# EAGLE board LaunchPadSpiBus2_a (EAGLE 6.4)
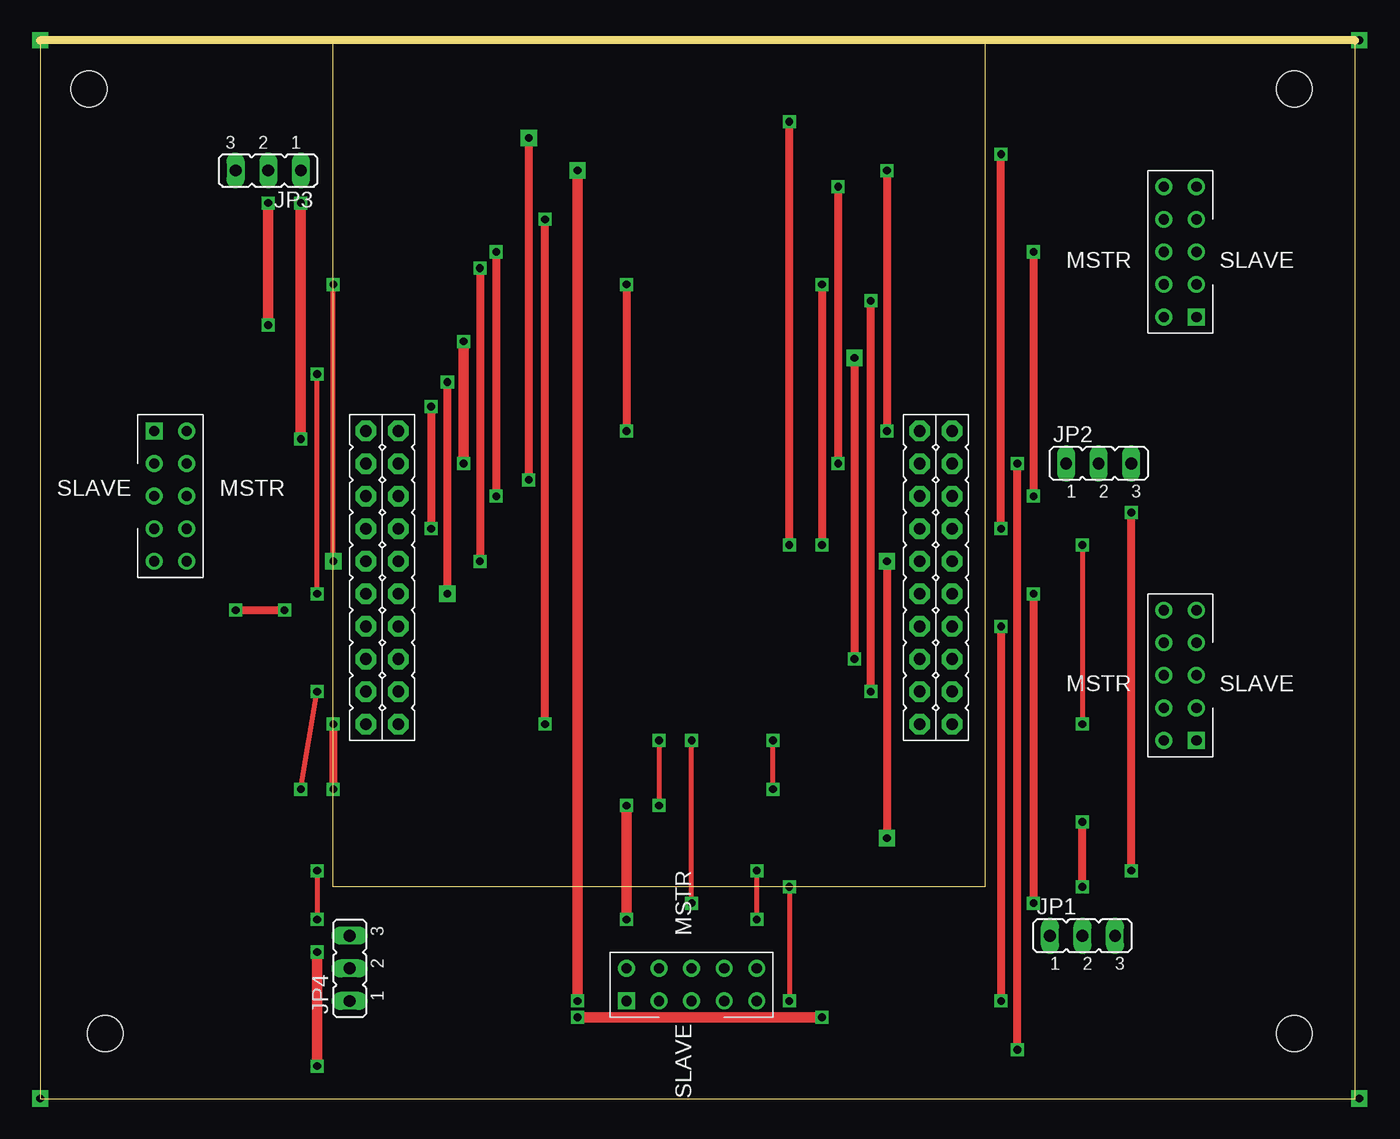
[diagram p0: board, top side]
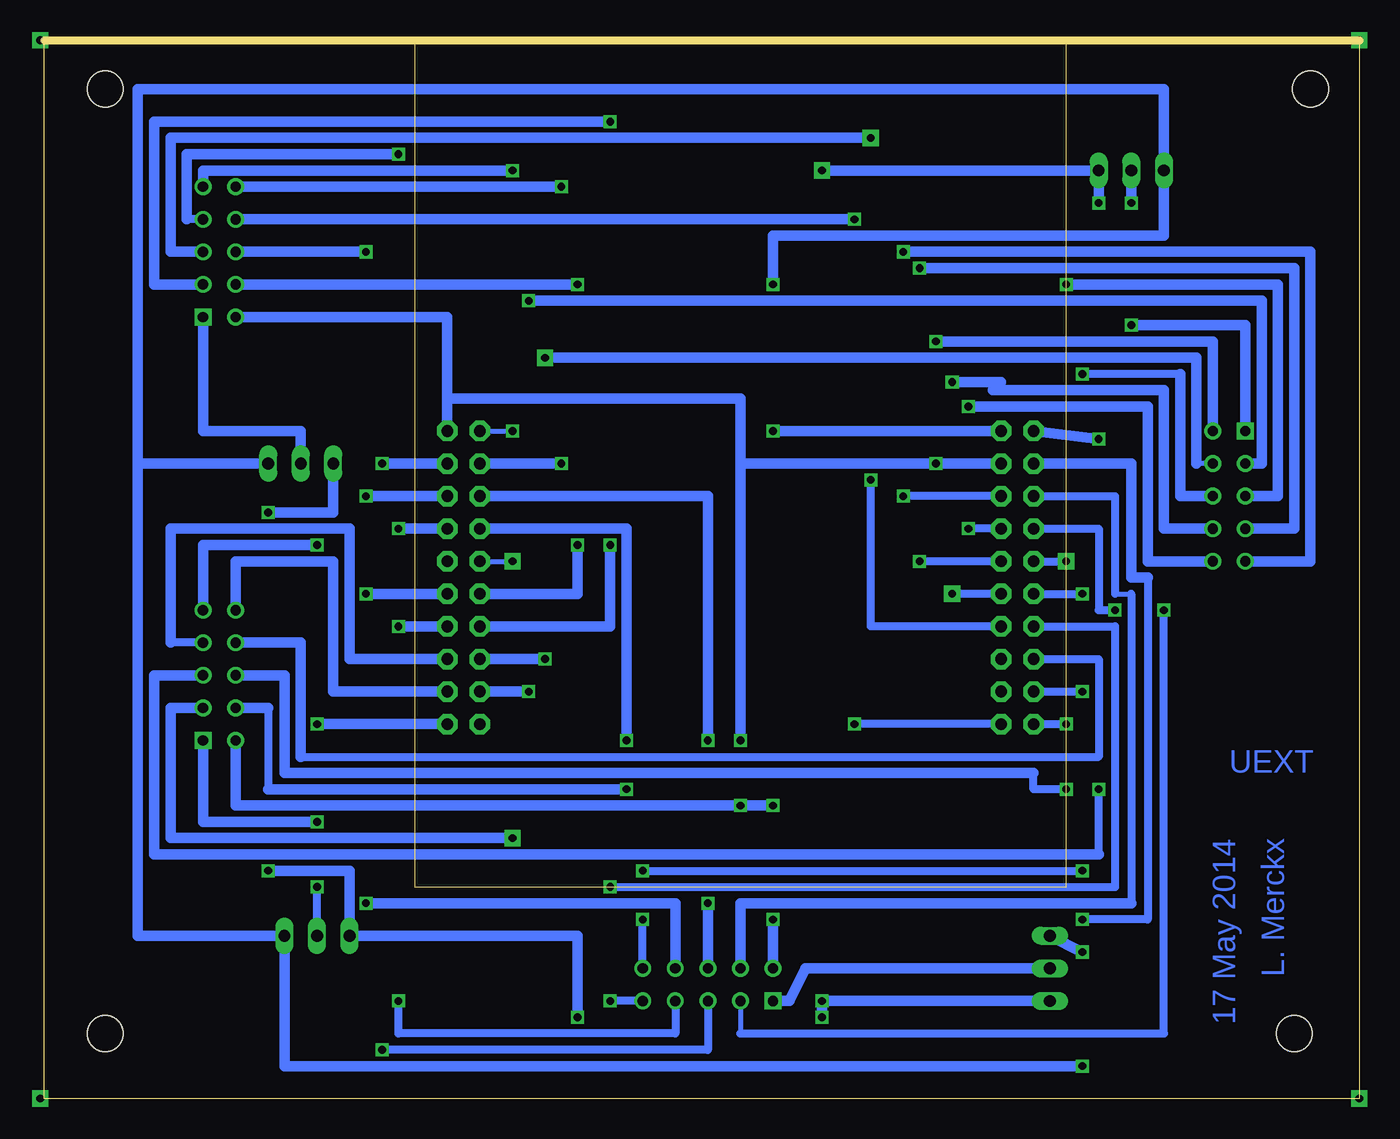
[diagram p1: board, bottom side, seen from below]

Size 102.54 x 82.55 mm. Coordinates in mm from the lower left corner, seen from the top.
Outline: 0,0 102.54,0 102.54,82.54 0,82.54 0,0
Copper layers (1*16): Top 0.035mm / dielectric 1.5mm / Bottom 0.035mm
Design rules "default": minimum track width 10mil, minimum drill 24mil, track to track 8mil, track to pad 8mil, pad to pad 8mil, via to via 8mil, smd to smd 8mil, copper to edge 40mil, drill to drill 8mil, minimum pad ring 10mil, minimum via ring 8mil, stop-mask expansion 4mil, vias tented up to drill 0mil, thermal gap 10mil
Holes 2.8 mm at 5.08,5.08 3.81,78.74 97.79,78.74 97.79,5.08

## Footprints (pad centres in the part's own frame; a part is rotated, then mirrored left to right if it is on the bottom)
JP2 = drill 0.914 long: 1 -2.54,0; 2 0,0; 3 2.54,0
LAUNCHPAD-XL = drill 0.914 pad 1.6 octagon: 3.3V 30.48,2.54; GND1 33.02,5.08; GND2 30.48,48.26; PA2 53.34,48.26; PA3 50.8,48.26; PA4 48.26,48.26; PA5 48.26,2.54; PA6 50.8,2.54; PA7 53.34,2.54; PB0 35.56,2.54; PB1 38.1,2.54; PB2 33.02,48.26; PB3 35.56,45.72; PB4 45.72,2.54; PB5 33.02,2.54; PB6 45.72,48.26; PB7 43.18,48.26; PC4 38.1,45.72; PC5 40.64,45.72; PC6 43.18,45.72; PC7 45.72,45.72; PD0 35.56,5.08; PD1 38.1,5.08; PD2 40.64,5.08; PD3 43.18,5.08; PD6 48.26,45.72; PD7 50.8,45.72; PE0 35.56,48.26; PE1 45.72,5.08; PE2 48.26,5.08; PE3 50.8,5.08; PE4 40.64,2.54; PE5 43.18,2.54; PF0 38.1,48.26; PF1 53.34,5.08; PF2 30.48,45.72; PF3 33.02,45.72; PF4 53.34,45.72; RST 40.64,48.26; VBUS 30.48,5.08
SPI_BUS2 = drill 0.8 square: +VCC 0,10.16 | drill 0.8: CS 2.54,0; GND 2.54,10.16; GPIO/RXD 2.54,7.62; INT/SDA 2.54,5.08; MISO 0,2.54; MOSI 2.54,2.54; RST/SCL 0,5.08; SCK 0,0; TXD 0,7.62

## Placement (x,y rotation side)
JP1  [JP2]  81.28,12.7 0 top
JP2  [JP2]  82.55,49.53 0 top
JP3  [JP2]  17.78,72.39 180 top
JP4  [JP2]  24.13,10.16 90 top
U$1  STELLARIS-LAUNCHPADSTELLARIS-LAUNCHPAD-XL  [LAUNCHPAD-XL]  22.86,82.55 270 top
U$2  SPI_BUS2  [SPI_BUS2]  90.17,38.1 180 top
U$3  SPI_BUS2  [SPI_BUS2]  90.17,71.12 180 top
U$4  SPI_BUS2  [SPI_BUS2]  8.89,41.91 0 top
U$5  SPI_BUS2  [SPI_BUS2]  55.88,7.62 90 top

## Library data of the parts
JP1-JP4 = jumper
U$1-U$5 = lieven

## Nets
+3V3: JP1.1 JP2.1 JP3.1 JP4.1 U$1.3.3V
+5V: JP1.3 JP2.3 JP3.3 JP4.3 U$1.VBUS
N$1: U$1.PA2 U$2.SCK
N$2: U$1.PA4 U$2.MISO
N$3: U$1.PA5 U$2.MOSI
N$4: U$1.PA3 U$2.CS
N$5: U$1.PC5 U$2.TXD
N$6: JP1.2 U$2.+VCC
N$7: U$1.GND1 U$1.GND2 U$2.GND U$3.GND U$4.GND U$5.GND
N$8: U$1.PF2 U$3.SCK
N$9: U$1.PF0 U$3.MISO
N$10: U$1.PF1 U$3.MOSI
N$11: U$1.PF3 U$3.CS
N$12: U$1.PD0 U$4.SCK
N$13: U$1.PD2 U$4.MISO
N$14: U$1.PD3 U$4.MOSI
N$15: U$1.PD1 U$4.CS
N$16: U$1.PB5 U$5.CS
N$17: U$1.PB6 U$5.MISO
N$18: U$1.PB7 U$5.MOSI
N$19: U$1.PB4 U$5.SCK
N$20: U$1.PA6 U$2.RST/SCL
N$21: U$1.PA7 U$2.INT/SDA
N$22: U$1.PC4 U$2.GPIO/RXD
N$23: U$1.PB3 U$5.INT/SDA
N$24: U$1.PB0 U$5.GPIO/RXD
N$25: U$1.PB2 U$5.RST/SCL
N$26: U$1.PB1 U$5.TXD
N$27: U$1.PD6 U$4.GPIO/RXD
N$28: U$1.PD7 U$4.TXD
N$29: U$1.PE4 U$4.RST/SCL
N$30: U$1.PE5 U$4.INT/SDA
N$31: U$1.PC6 U$3.GPIO/RXD
N$32: U$1.PC7 U$3.TXD
N$33: U$1.PE0 U$3.INT/SDA
N$34: U$1.PE1 U$3.RST/SCL
N$35: JP2.2 U$3.+VCC
N$36: JP3.2 U$4.+VCC
N$37: JP4.2 U$5.+VCC
RST: U$1.RST

## Tracks (layer width: path | path; a pad name or v marks a point on that pad's centre or on a via)
+3V3  (via drill 0.6, 0.6 pad 1.02, 0.6 pad 1.27)
  Top 0.61: v85.09,17.78 v85.09,45.72
  Top 0.813: v41.91,7.62 v41.91,72.39 | v20.32,69.85 v20.32,51.44 | v41.91,6.35 v60.96,6.35
  Bottom 0.813: JP2.1 80.01,45.72 v85.09,45.72 | v85.09,17.78 78.74,17.78 JP1.1 60.96,12.7 v60.96,6.35 | U$1.3.3V v20.32,51.44 | JP4.1 v41.91,7.62 v41.91,6.35 | v41.91,72.39 JP3.1 v20.32,69.85
+5V  (via drill 0.6 pad 1.02)
  Top 0.61: v45.72,63.5 v45.72,52.07
  Top 0.813: v21.59,11.43 v21.59,2.54
  Bottom 0.813: 95.25,49.53 95.25,78.74 15.24,78.74 JP3.3 15.24,67.31 45.72,67.31 v45.72,63.5 | JP2.3 95.25,49.53 | 95.25,49.53 95.25,12.7 JP1.3 83.82,2.54 v21.59,2.54 | JP4.3 v21.59,11.43 | v45.72,52.07 U$1.VBUS
N$1  (via drill 0.6 pad 1.02)
  Top 0.406: v81.28,43.18 v81.28,29.21
  Bottom 0.813: U$2.SCK 90.17,43.18 v81.28,43.18 | U$1.PA2 v81.28,29.21
N$2
  Bottom 0.61: U$2.MISO 92.71,35.56
  Bottom 0.813: 92.71,35.56 92.71,44.45 78.74,44.45 78.74,34.29 U$1.PA4
N$3
  Bottom 0.61: 82.55,26.67 20.32,26.67 20.32,34.29 U$1.PA5
  Bottom 0.813: U$2.MOSI 82.55,35.56 82.55,26.67
N$4
  Bottom 0.813: U$2.CS 87.63,41.91 80.01,41.91 80.01,31.75 U$1.PA3
N$5  (via drill 0.6 pad 1.27)
  Top 0.61: v66.04,41.91 v66.04,20.32
  Bottom 0.406: U$1.PC5 v66.04,41.91
  Bottom 0.813: U$2.TXD 92.71,30.48 92.71,20.32 v66.04,20.32
N$6  (via drill 0.6 pad 1.02)
  Top 0.61: v81.28,16.51 v81.28,21.59
  Bottom 0.61: JP1.2 v81.28,16.51
  Bottom 0.813: U$2.+VCC 90.17,21.59 v81.28,21.59
N$7  (via drill 0.6 pad 1.02)
  Top 0.406: v48.26,27.94 v48.26,22.86
  Top 0.813: v33.02,59.05 v33.02,49.53 | v45.72,13.97 v45.72,22.86
  Bottom 0.406: 48.26,49.53 v48.26,27.94
  Bottom 0.813: U$4.GND 11.43,59.05 v33.02,59.05 | U$1.GND1 v33.02,49.53 48.26,49.53 | U$3.GND 71.12,60.96 71.12,54.61 | U$1.GND2 71.12,54.61 | 71.12,54.61 48.26,54.61 v48.26,27.94 | U$2.GND 87.63,22.86 v48.26,22.86 v45.72,22.86 | U$5.GND v45.72,13.97
N$8  (via drill 0.6 pad 1.02)
  Top 0.61: v66.04,72.39 v66.04,52.07
  Bottom 0.406: U$1.PF2 v66.04,52.07
  Bottom 0.813: U$3.SCK 90.17,72.39 v66.04,72.39
N$9  (via drill 0.6 pad 1.02)
  Top 0.61: v74.93,44.45 v74.93,73.66
  Bottom 0.61: U$3.MISO 91.44,68.58
  Bottom 0.813: 91.44,68.58 91.44,73.66 v74.93,73.66 | U$1.PF0 v74.93,44.45
N$10  (via drill 0.6 pad 1.02)
  Top 0.61: v39.37,29.21 v39.37,68.58
  Bottom 0.61: U$1.PF1 v39.37,29.21
  Bottom 0.813: U$3.MOSI v39.37,68.58
N$11  (via drill 0.6 pad 1.02)
  Top 0.61: v62.23,71.12 v62.23,49.53
  Bottom 0.813: U$3.CS v62.23,71.12 | U$1.PF3 v62.23,49.53
N$12  (via drill 0.6 pad 1.02)
  Top 0.61: v35.56,66.04 v35.56,46.99
  Bottom 0.61: U$1.PD0 v35.56,46.99
  Bottom 0.813: U$4.SCK 3.81,41.91 3.81,66.04 v35.56,66.04
N$13  (via drill 0.6 pad 1.02)
  Top 0.61: v34.29,64.77 v34.29,41.91
  Bottom 0.61: U$1.PD2 v34.29,41.91
  Bottom 0.813: U$4.MISO 5.08,44.45 5.08,64.77 v34.29,64.77
N$14  (via drill 0.6 pad 1.02, 0.6 pad 1.27)
  Top 0.61: v31.75,55.88 v31.75,39.37
  Bottom 0.61: 28.57,55.24 27.94,55.88 | U$1.PD3 v31.75,39.37
  Bottom 0.813: U$4.MOSI 15.24,44.45 15.24,55.24 28.57,55.24 | 27.94,55.88 v31.75,55.88
N$15  (via drill 0.6 pad 1.02)
  Top 0.61: v30.48,53.98 v30.48,44.45
  Bottom 0.61: U$1.PD1 v30.48,44.45
  Bottom 0.813: U$4.CS 16.51,41.91 16.51,53.98 v30.48,53.98
N$16  (via drill 0.6 pad 1.02)
  Top 0.406: v21.59,17.78 v21.59,13.97 | v55.88,13.97 v55.88,17.78
  Bottom 0.61: 16.51,40.64 16.51,13.97 v21.59,13.97 | v55.88,17.78 v21.59,17.78 | U$5.CS v55.88,13.97
  Bottom 0.813: U$1.PB5 17.78,49.53 17.78,40.64 16.51,40.64
N$17  (via drill 0.6 pad 1.02)
  Top 0.61: v74.93,36.83 v74.93,7.62
  Bottom 0.61: U$5.MISO 53.34,5.08 74.93,5.08 v74.93,7.62
  Bottom 0.813: U$1.PB6 v74.93,36.83
N$18  (via drill 0.6 pad 1.02)
  Top 0.61: v77.47,39.37 v77.47,15.24
  Bottom 0.813: U$5.MOSI 53.34,15.24 v77.47,15.24 | U$1.PB7 v77.47,39.37
N$19  (via drill 0.6 pad 1.02)
  Top 0.406: v58.42,16.51 v58.42,7.62
  Bottom 0.61: U$5.SCK v58.42,7.62 | v58.42,16.51 19.05,16.51 19.05,36.83 U$1.PB4
N$20  (via drill 0.6, 0.6 pad 1.02)
  Top 0.406: v20.32,24.13 v21.59,31.75
  Bottom 0.61: 20.32,19.05 v20.32,24.13 | U$1.PA6 v21.59,31.75
  Bottom 0.813: U$2.RST/SCL 93.98,33.02 93.98,19.05 20.32,19.05
N$21  (via drill 0.6 pad 1.02)
  Top 0.61: v22.86,29.21 v22.86,24.13
  Bottom 0.61: U$1.PA7 v22.86,29.21 | v22.86,24.13 25.4,24.13 25.4,25.4
  Bottom 0.813: U$2.INT/SDA 83.82,33.02 83.82,25.4 25.4,25.4
N$22  (via drill 0.6 pad 1.02)
  Top 0.406: v57.15,24.13 v57.15,27.94
  Bottom 0.61: 85.09,30.48 85.09,24.13
  Bottom 0.813: U$2.GPIO/RXD 85.09,30.48 | 85.09,24.13 v57.15,24.13 | U$1.PC4 57.15,44.45 v57.15,27.94
N$23  (via drill 0.6, 0.6 pad 1.02)
  Top 0.406: v50.8,15.24 v50.8,27.94
  Bottom 0.813: U$1.PB3 50.8,46.99 v50.8,27.94 | U$5.INT/SDA v50.8,15.24
N$24
  Bottom 0.406: 19.05,39.37 17.78,39.37
  Bottom 0.61: U$1.PB0 19.05,46.99 19.05,39.37 | 17.78,39.37 17.78,15.24
  Bottom 0.813: U$5.GPIO/RXD 48.26,15.24 17.78,15.24
N$25  (via drill 0.6 pad 1.02)
  Top 0.61: v76.2,3.81 v76.2,49.53
  Bottom 0.61: U$5.RST/SCL 50.8,3.81 v76.2,3.81
  Bottom 0.813: U$1.PB2 v76.2,49.53
N$26  (via drill 0.6 pad 1.02)
  Top 0.61: v15.24,38.1 v19.05,38.1
  Bottom 0.406: U$5.TXD 48.26,5.08
  Bottom 0.61: 48.26,5.08 15.24,5.08 v15.24,38.1 | U$1.PB1 20.32,44.45 20.32,38.1 v19.05,38.1
N$27  (via drill 0.6 pad 1.02, 0.6 pad 1.27)
  Top 0.61: v63.5,57.78 v63.5,34.29
  Bottom 0.406: U$4.GPIO/RXD 12.7,49.53
  Bottom 0.813: 12.7,49.53 12.7,57.78 v63.5,57.78 | U$1.PD6 v63.5,34.29
N$28  (via drill 0.6 pad 1.02)
  Top 0.61: v64.77,31.75 v64.77,62.23
  Bottom 0.813: U$4.TXD 7.62,49.53 7.62,62.23 v64.77,62.23 | U$1.PD7 v64.77,31.75
N$29  (via drill 0.6 pad 1.02, 0.6 pad 1.27)
  Top 0.406: v22.86,41.91 v22.86,63.5
  Bottom 0.61: U$1.PE4 v22.86,41.91
  Bottom 0.813: U$4.RST/SCL 6.35,46.99 6.35,63.5 v22.86,63.5
N$30  (via drill 0.6 pad 1.02)
  Top 0.406: v21.59,39.37 v21.59,56.52
  Bottom 0.61: 13.97,56.52 v21.59,56.52 | U$1.PE5 v21.59,39.37
  Bottom 0.813: U$4.INT/SDA 13.97,46.99 13.97,56.52
N$31  (via drill 0.6, 0.6 pad 1.02)
  Top 0.61: v60.96,63.5 v60.96,43.18
  Bottom 0.813: U$3.GPIO/RXD v60.96,63.5 | U$1.PC6 60.96,39.37 v60.96,43.18
N$32  (via drill 0.6 pad 1.02)
  Top 0.61: v58.42,43.18 v58.42,76.2
  Bottom 0.813: U$3.TXD 93.98,63.5 93.98,76.2 v58.42,76.2 | U$1.PC7 58.42,36.83 v58.42,43.18
N$33  (via drill 0.6 pad 1.02)
  Top 0.61: v77.47,66.04 v77.47,46.99
  Bottom 0.813: U$3.INT/SDA v77.47,66.04 | U$1.PE0 v77.47,46.99
N$34  (via drill 0.6 pad 1.02, 0.6 pad 1.27)
  Top 0.61: v38.1,74.93 v38.1,48.26
  Bottom 0.61: U$1.PE1 38.1,36.83 v38.1,48.26
  Bottom 0.813: U$3.RST/SCL 92.71,66.04 92.71,74.93 v38.1,74.93
N$35
  Bottom 0.813: U$3.+VCC 90.17,52.07 82.55,52.07 JP2.2
N$36  (via drill 0.6, 0.6 pad 1.02)
  Top 0.813: v17.78,69.85 v17.78,60.32
  Bottom 0.813: U$4.+VCC 8.89,60.32 v17.78,60.32 | JP3.2 v17.78,69.85
N$37
  Bottom 0.813: U$5.+VCC 44.45,7.62 43.18,10.16 JP4.2
N$38  (via drill 0.6 pad 1.27)
  other vias: 5.08,5.08
N$39  (via drill 0.6 pad 1.27)
  other vias: 97.79,5.08
N$40  (via drill 0.6 pad 1.27)
  other vias: 97.79,78.74
N$41  (via drill 0.6 pad 1.27)
  other vias: 3.81,78.74
N$42  (via drill 0.6 pad 1.27)
  other vias: 0,0
N$43  (via drill 0.6 pad 1.27)
  other vias: 102.87,0
N$44  (via drill 0.6 pad 1.27)
  other vias: 102.87,82.55
N$45  (via drill 0.6 pad 1.27)
  other vias: 0,82.55

## Text on the board
Bottom: UEXT | L. Merckx | 17 May 2014